# EAGLE board uno (EAGLE 6.1)
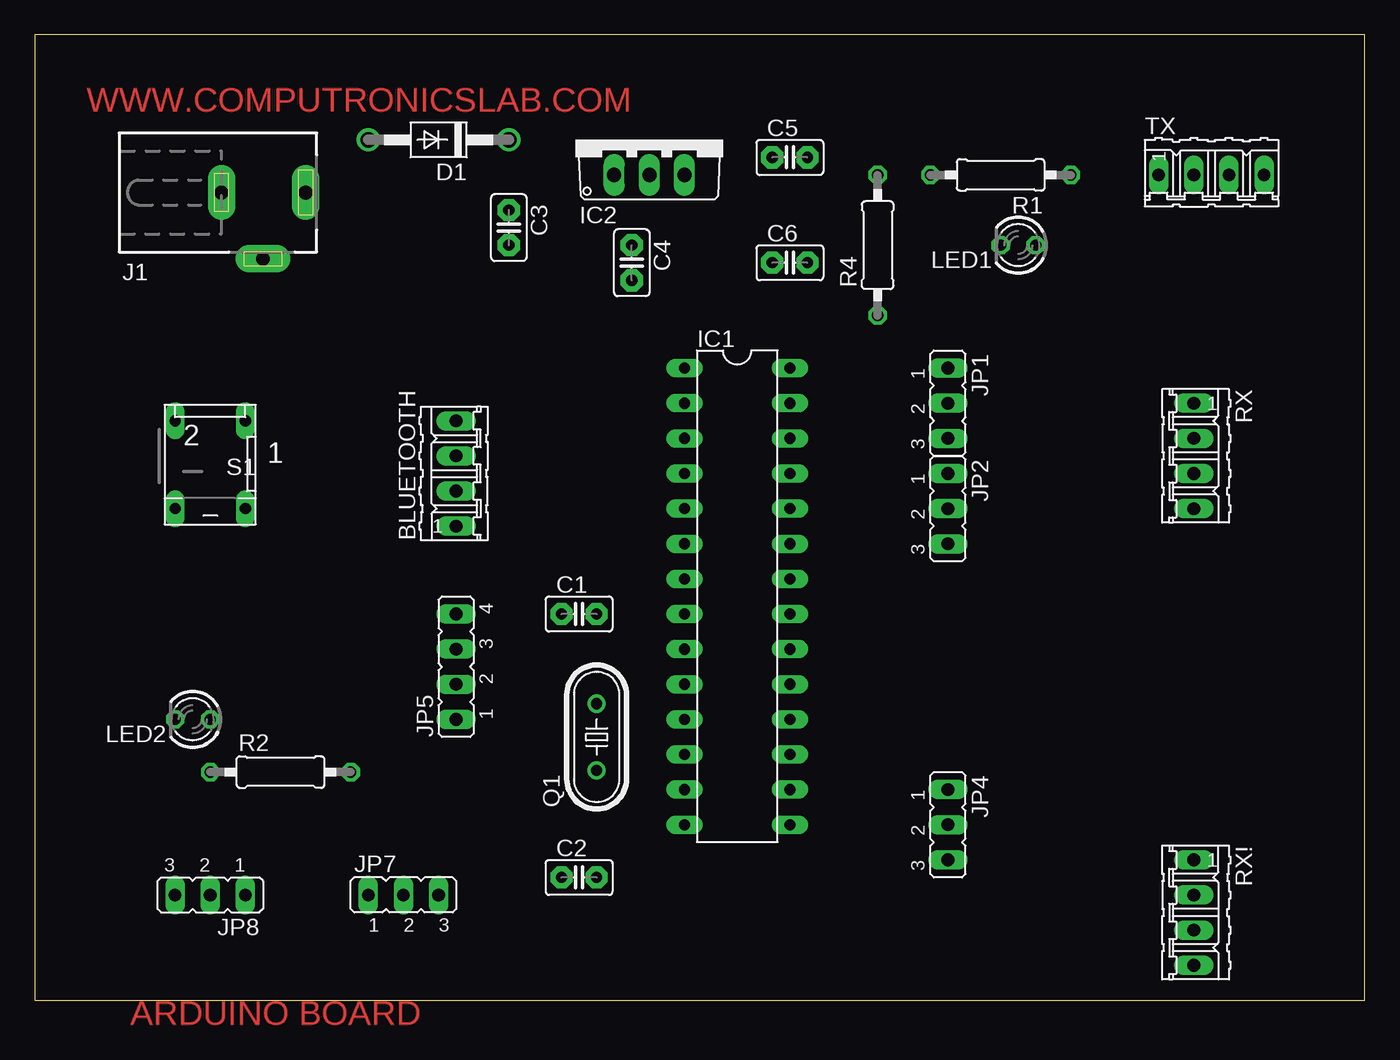
[diagram p0: board, top side]
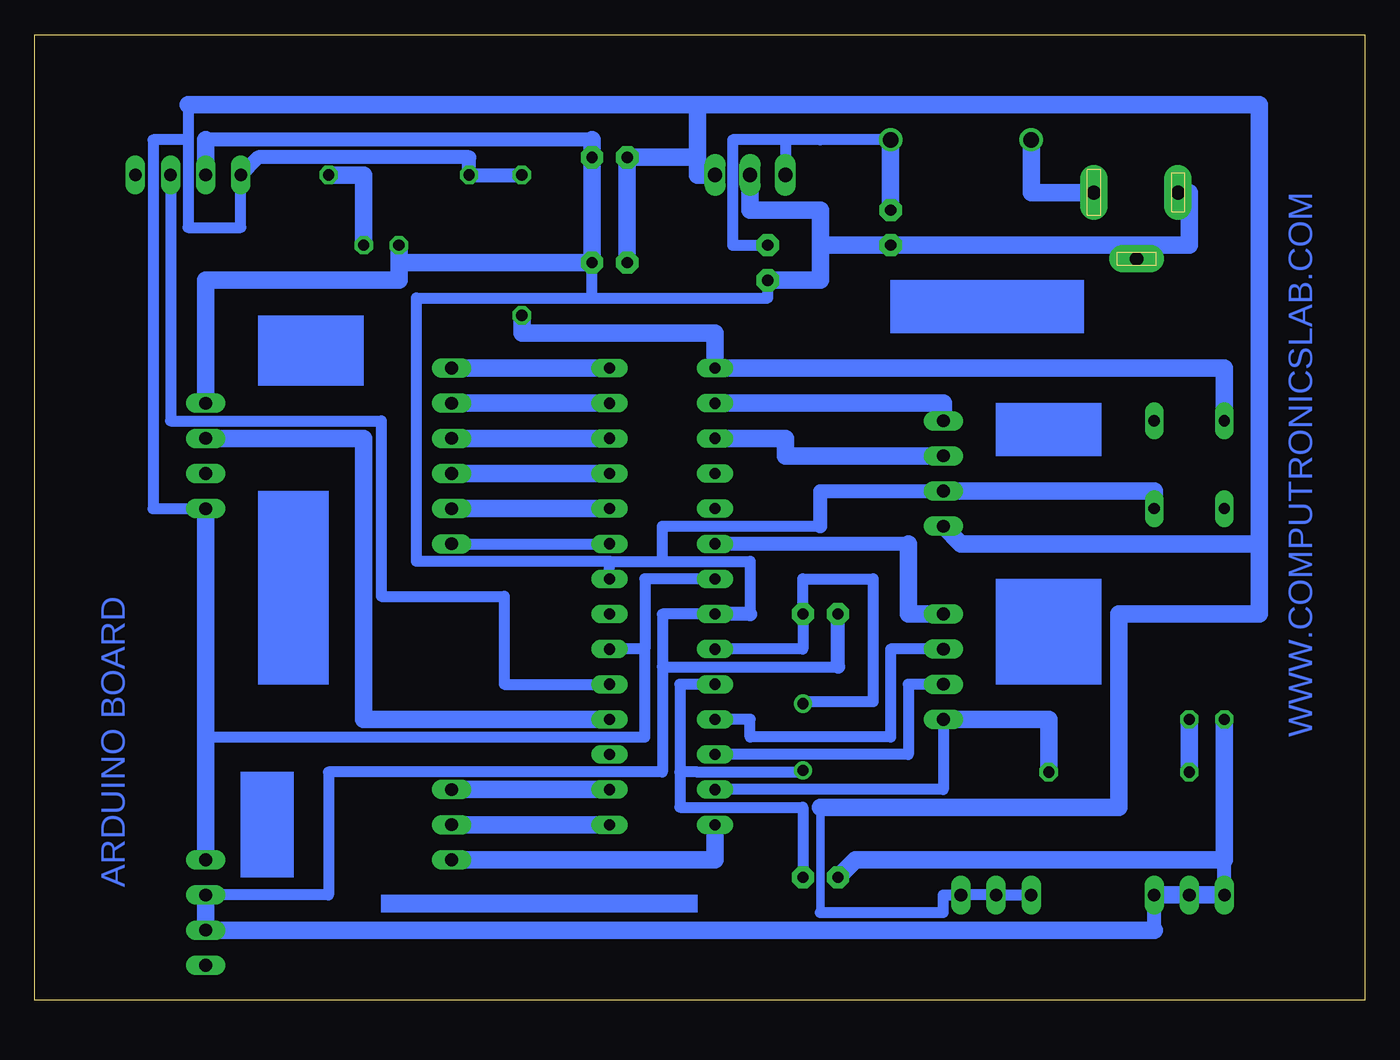
[diagram p1: board, bottom side, seen from below]

Size 96.19 x 69.84 mm. Coordinates in mm from the lower left corner, seen from the top.
Outline: 0,0 96.19,0 96.19,69.84 0,69.84 0,0
Copper layers (1*16): Top 0.035mm / dielectric 1.5mm / Bottom 0.035mm
Design rules: minimum track width 20mil, minimum drill 24mil, track to track 8mil, track to pad 8mil, pad to pad 8mil, via to via 8mil, smd to smd 8mil, copper to edge 40mil, drill to drill 8mil, minimum pad ring 10mil, minimum via ring 8mil, stop-mask expansion 4mil, vias tented up to drill 0mil, thermal gap 10mil

## Footprints (pad centres in the part's own frame; a part is rotated, then mirrored left to right if it is on the bottom)
04P = drill 0.914 long: 1 -3.81,0; 2 -1.27,0; 3 1.27,0; 4 3.81,0
C2.5-2 = drill 0.813 pad 1.6 octagon: 1 -1.27,0; 2 1.27,0
DO41-10 = drill 1.118: A 5.08,0; C -5.08,0
DIL28-3 = drill 0.813 long: 1 -16.51,-3.81; 2 -13.97,-3.81; 3 -11.43,-3.81; 4 -8.89,-3.81; 5 -6.35,-3.81; 6 -3.81,-3.81; 7 -1.27,-3.81; 8 1.27,-3.81; 9 3.81,-3.81; 10 6.35,-3.81; 11 8.89,-3.81; 12 11.43,-3.81; 13 13.97,-3.81; 14 16.51,-3.81; 15 16.51,3.81; 16 13.97,3.81; 17 11.43,3.81; 18 8.89,3.81; 19 6.35,3.81; 20 3.81,3.81; 21 1.27,3.81; 22 -1.27,3.81; 23 -3.81,3.81; 24 -6.35,3.81; 25 -8.89,3.81; 26 -11.43,3.81; 27 -13.97,3.81; 28 -16.51,3.81
TO220V = drill 1.016 long: 1 -2.54,-2.54; 2 0,-2.54; 3 2.54,-2.54
DCJ0303 = drill 1 pad 2 long: 1 0,3.1; 2 4.8,0; 3 0,-3
JP2 = drill 0.914 long: 1 -2.54,0; 2 0,0; 3 2.54,0
JP4 = drill 0.914 long: 1 -3.81,0; 2 -1.27,0; 3 1.27,0; 4 3.81,0
LED3MM = drill 0.813 octagon: A -1.27,0; K 1.27,0
HC49/S = drill 0.813: 1 -2.413,0; 2 2.413,0
0207/10 = drill 0.813 octagon: 1 -5.08,0; 2 5.08,0
DP-02 = drill 0.813 long: 1 -2.54,-2.54; 2 2.54,-2.54; 3 2.54,3.81; 4 -2.54,3.81

## Placement (x,y rotation side)
BLUETOOTH  [04P]  30.48,38.1 90 top
C1  22pf  [C2.5-2]  39.37,27.94 0 top
C2  22pf  [C2.5-2]  39.37,8.89 0 top
C3  470UF  [C2.5-2]  34.29,55.88 270 top
C4  0.1uf  [C2.5-2]  43.18,53.34 270 top
C5  0.1uf  [C2.5-2]  54.61,60.96 0 top
C6  4.7uf  [C2.5-2]  54.61,53.34 0 top
D1  1N4007  [DO41-10]  29.21,62.23 180 top
IC1  ATMEGA328  [DIL28-3]  50.8,29.21 270 top
IC2  7805  [TO220V]  44.45,62.23 0 top
J1  [DCJ0303]  16.51,58.42 270 top
JP1  [JP2]  66.04,43.18 270 top
JP2  [JP2]  66.04,35.56 270 top
JP4  [JP2]  66.04,12.7 270 top
JP5  [JP4]  30.48,24.13 90 top
JP7  [JP2]  26.67,7.62 0 top
JP8  [JP2]  12.7,7.62 180 top
LED1  [LED3MM]  71.12,54.61 180 top
LED2  [LED3MM]  11.43,20.32 180 top
Q1  12MHZ  [HC49/S]  40.64,19.05 90 top
R1  220R  [0207/10]  69.85,59.69 180 top
R2  330R  [0207/10]  17.78,16.51 0 top
R4  10K  [0207/10]  60.96,54.61 90 top
RX  [04P]  83.82,39.37 270 top
RX!  [04P]  83.82,6.35 270 top
S1  [DP-02]  12.7,39.37 180 top
TX  [04P]  85.09,59.69 0 top

## Library data of the parts
BLUETOOTH RX RX! TX = con-amp-quick; OC_FARNELL: unknown; OC_NEWARK: unknown
C1-C6 = capacitor-wima
D1 = diode
IC1 = quantum-research-group; OC_FARNELL: unknown; OC_NEWARK: unknown
IC2 = linear
J1 = con-jack; OC_FARNELL: unknown; OC_NEWARK: unknown
JP1 JP2 JP4 JP5 JP7 JP8 = jumper
LED1 LED2 = led
Q1 = crystal; OC_FARNELL: 1667008; OC_NEWARK: unknown
R1 R2 R4 = rcl
S1 = switch-dil; MPN: MCDP02; OC_FARNELL: 1255233; OC_NEWARK: 26M1095

## Nets
N$1: C1.2 IC1.9 Q1.2
N$2: C2.2 IC1.10 Q1.1
N$3: D1.A J1.1
N$4: BLUETOOTH.1 C5.1 C6.1 IC1.7 IC1.20 IC2.3 JP7.1 JP7.2 JP7.3 R1.2 R4.2 RX!.1 RX.4 TX.1
N$5: BLUETOOTH.2 C1.1 C2.1 C3.2 C4.2 C5.2 C6.2 IC1.8 IC1.22 IC2.2 J1.2 J1.3 JP8.1 JP8.2 JP8.3 LED1.K LED2.K RX!.2 RX!.3 RX.1 S1.4 TX.2
N$6: LED1.A R1.1
N$7: C3.1 C4.1 D1.C IC2.1
N$8: IC1.28 JP1.1
N$9: IC1.27 JP1.2
N$10: IC1.26 JP1.3
N$11: IC1.25 JP2.1
N$12: IC1.24 JP2.2
N$13: IC1.23 JP2.3
N$14: BLUETOOTH.4 IC1.2
N$15: S1.3
N$17: BLUETOOTH.3 IC1.3
N$18: IC1.6 JP5.4
N$19: IC1.12 JP5.2
N$20: IC1.11 JP5.3
N$21: IC1.13 JP5.1 R2.2
N$22: IC1.14 JP4.3
N$23: IC1.15 JP4.2
N$24: IC1.16 JP4.1
N$26: IC1.18 RX.2
N$27: IC1.19 TX.3
N$31: IC1.1 R4.1 S1.2
N$32: LED2.A R2.1

## Tracks (layer width: path | path; a pad name or v marks a point on that pad's centre or on a via)
N$1
  Bottom 0.508: 40.64,21.59 Q1.2
  Bottom 0.813: 40.64,21.59 35.56,21.59 35.56,30.48 40.64,30.48 C1.2 40.64,25.4 IC1.9
N$2
  Bottom 0.508: 40.64,16.51 Q1.1
  Bottom 0.813: 40.64,16.51 48.26,16.51 49.53,16.51 | 49.53,16.51 49.53,22.86 IC1.10 | C2.2 40.64,13.97 49.53,13.97 49.53,16.51
N$3
  Bottom 1.27: J1.1 24.13,58.42 D1.A
N$4
  Bottom 0.61: 39.37,13.97 39.37,6.35
  Bottom 0.813: 52.07,25.4 52.07,30.48 IC1.7 | 52.07,25.4 IC1.20 | 52.07,25.4 52.07,19.05 83.82,19.05 | JP7.1 JP7.2 JP7.3 30.48,7.62 30.48,6.35 39.37,6.35 | TX.1 81.28,55.88 85.09,55.88 85.09,62.23 | 85.09,64.77 85.09,62.23 | RX.4 87.63,35.56 87.63,62.23 85.09,62.23
  Bottom 1.016: R4.2 R1.2 64.77,60.96 80.01,60.96 TX.1
  Bottom 1.27: RX.4 83.82,19.05 RX!.1 | 48.26,60.96 48.26,59.69 IC2.3 | 48.26,60.96 C5.1 C6.1 | 39.37,13.97 17.78,13.97 17.78,27.94 7.62,27.94 7.62,33.02 | 7.62,33.02 7.62,64.77 48.26,64.77 | 48.26,60.96 48.26,64.77 | 48.26,64.77 85.09,64.77 | BLUETOOTH.1 29.21,33.02 7.62,33.02
N$5
  Bottom 0.813: 55.88,50.8 43.18,50.8 C4.2 | 44.45,27.94 44.45,31.75 50.8,31.75 | 54.61,31.75 50.8,31.75 | IC1.22 54.61,31.75 | 50.8,24.13 38.1,24.13 | 50.8,24.13 50.8,27.94 IC1.8 | RX!.2 74.93,7.62 74.93,16.51 50.8,16.51 50.8,24.13 | 39.37,34.29 50.8,34.29 50.8,31.75 | 55.88,50.8 C6.2 | 55.88,50.8 68.58,50.8 68.58,31.75 54.61,31.75
  Bottom 1.016: 55.88,62.23 83.82,62.23 | 44.45,27.94 IC1.8 | 39.37,34.29 39.37,36.83 BLUETOOTH.2 | JP8.3 10.16,10.16 | 38.1,24.13 C1.1 | 15.24,5.08 JP8.1
  Bottom 1.27: 16.51,54.61 12.7,54.61 12.7,58.42 J1.3 | IC2.2 44.45,57.15 39.37,57.15 39.37,54.61 | 39.37,54.61 C3.2 16.51,54.61 | 39.37,54.61 39.37,52.07 C4.2 | 16.51,54.61 J1.2 | 83.82,62.23 TX.2 | 55.88,62.23 C5.2 C6.2 69.85,53.34 | 69.85,53.34 LED1.K | 69.85,53.34 69.85,52.07 83.82,52.07 RX.1 | BLUETOOTH.2 15.24,36.83 S1.4 | RX!.2 RX!.3 15.24,5.08 | LED2.K 10.16,10.16 36.83,10.16 C2.1 | JP8.3 JP8.2 JP8.1
N$6
  Bottom 1.27: LED1.A 72.39,59.69 R1.1
N$7
  Bottom 0.508: 39.37,62.23 41.91,62.23
  Bottom 0.813: 41.91,62.23 IC2.1 | D1.C 39.37,62.23 45.72,62.23 45.72,54.61 C4.1
  Bottom 1.27: D1.C C3.1
N$8
  Bottom 1.27: JP1.1 IC1.28
N$9
  Bottom 1.27: JP1.2 IC1.27
N$10
  Bottom 1.27: JP1.3 IC1.26
N$11
  Bottom 1.27: JP2.1 IC1.25
N$12
  Bottom 1.27: JP2.2 IC1.24
N$13
  Bottom 0.813: JP2.3 IC1.23
N$14
  Bottom 1.27: IC1.2 30.48,43.18 BLUETOOTH.4
N$17
  Bottom 1.27: IC1.3 41.91,40.64 41.91,39.37 BLUETOOTH.3
N$18
  Bottom 1.016: 33.02,33.02 IC1.6
  Bottom 1.27: JP5.4 33.02,27.94 33.02,33.02
N$19
  Bottom 0.813: IC1.12 33.02,17.78 33.02,22.86 JP5.2
N$20
  Bottom 0.813: IC1.11 44.45,20.32 44.45,19.05 34.29,19.05 34.29,25.4 JP5.3
N$21
  Bottom 0.813: IC1.13 30.48,15.24 JP5.1
  Bottom 1.27: R2.2 22.86,20.32 JP5.1
N$22
  Bottom 1.27: IC1.14 46.99,10.16 JP4.3
N$23
  Bottom 1.27: JP4.2 IC1.15
N$24
  Bottom 1.27: JP4.1 IC1.16
N$26
  Bottom 1.27: IC1.18 72.39,20.32 72.39,40.64 RX.2
N$27
  Bottom 0.813: IC1.19 62.23,22.86 62.23,29.21 71.12,29.21 71.12,41.91 86.36,41.91 TX.3
N$31
  Bottom 1.27: S1.2 10.16,45.72 IC1.1 46.99,48.26 60.96,48.26 R4.1
N$32
  Bottom 1.27: LED2.A R2.1
(copper drawn outside any net)
  shapes: Bottom area x7

## Text on the board
Top: WWW.COMPUTRONICSLAB.COM | ARDUINO BOARD
Bottom: ARDUINO BOARD | WWW.COMPUTRONICSLAB.COM